# Altium PCB PCB1.PcbDoc
Units mil, origin at the board's own origin, x right, y up, seen from the top; angles counter-clockwise.
Board outline 2820.03 x 3975.03 mil, 2 copper layers (Top Layer, Bottom Layer); 35 components, 29 nets, 132 pads, 14 vias.
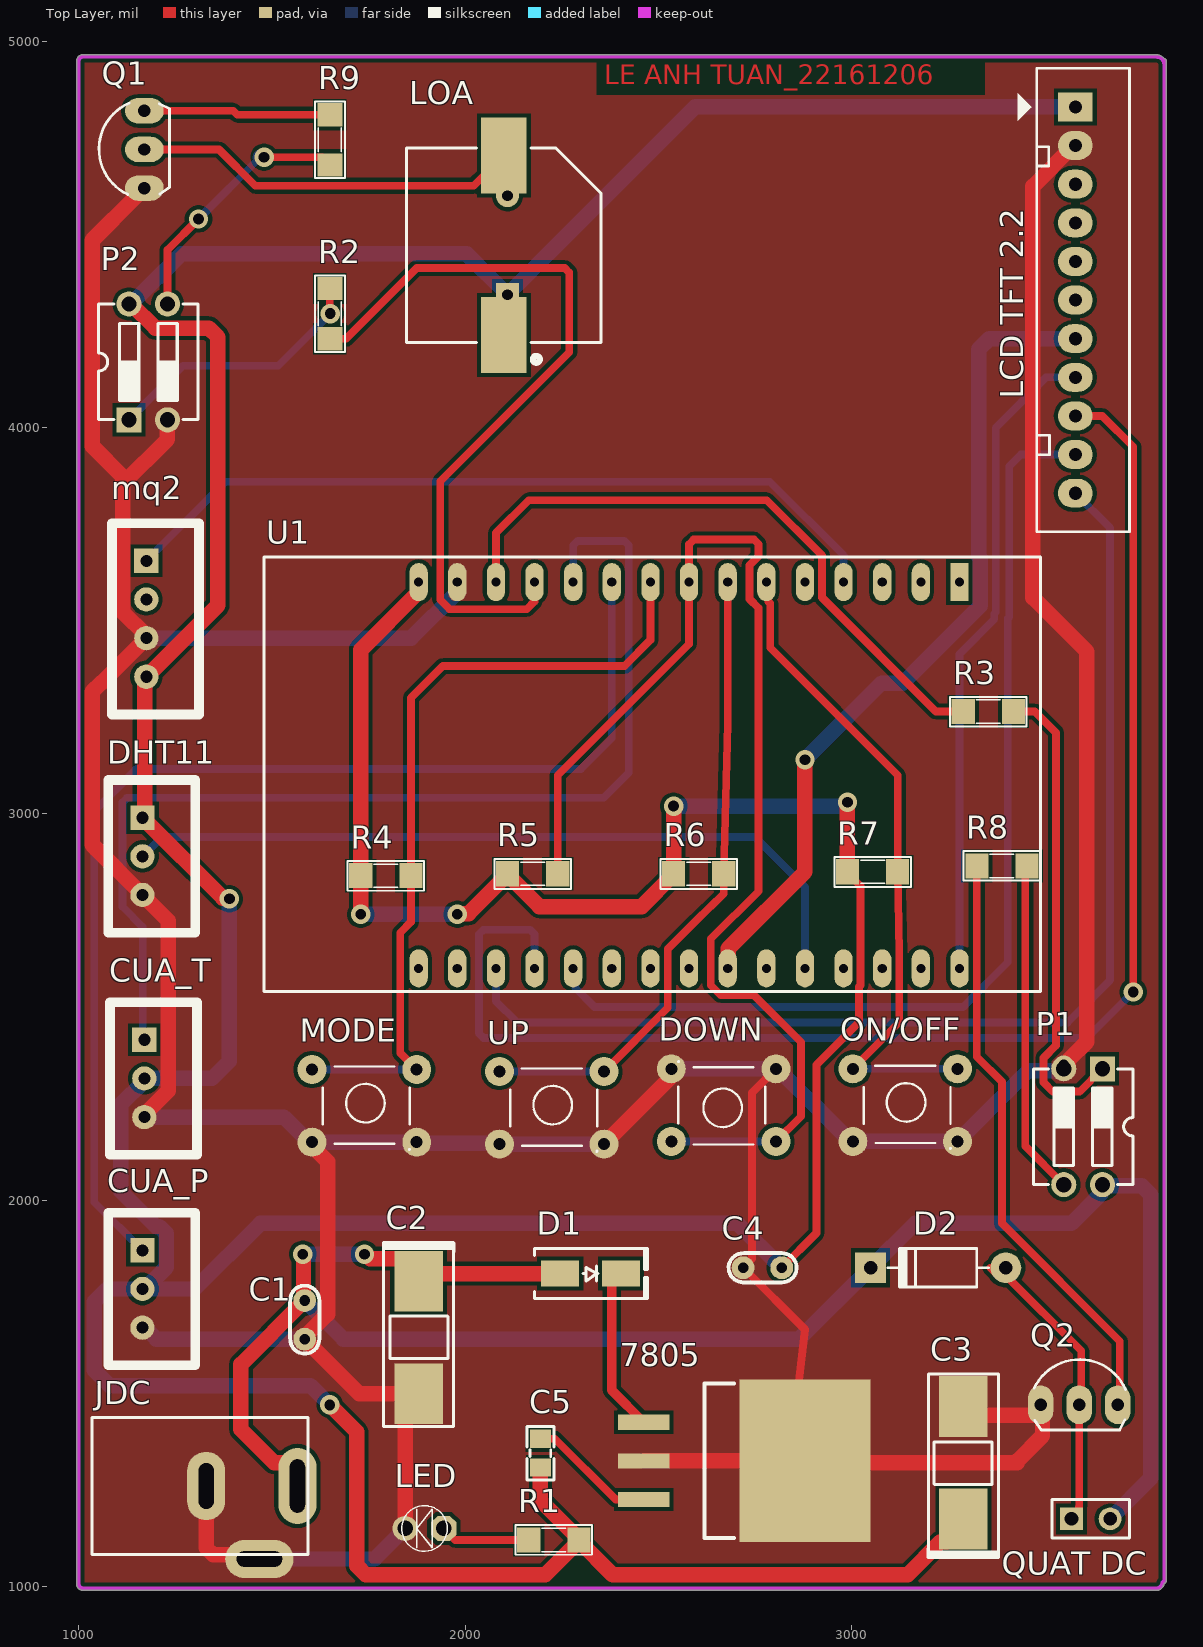
[diagram p0: Top Layer view]
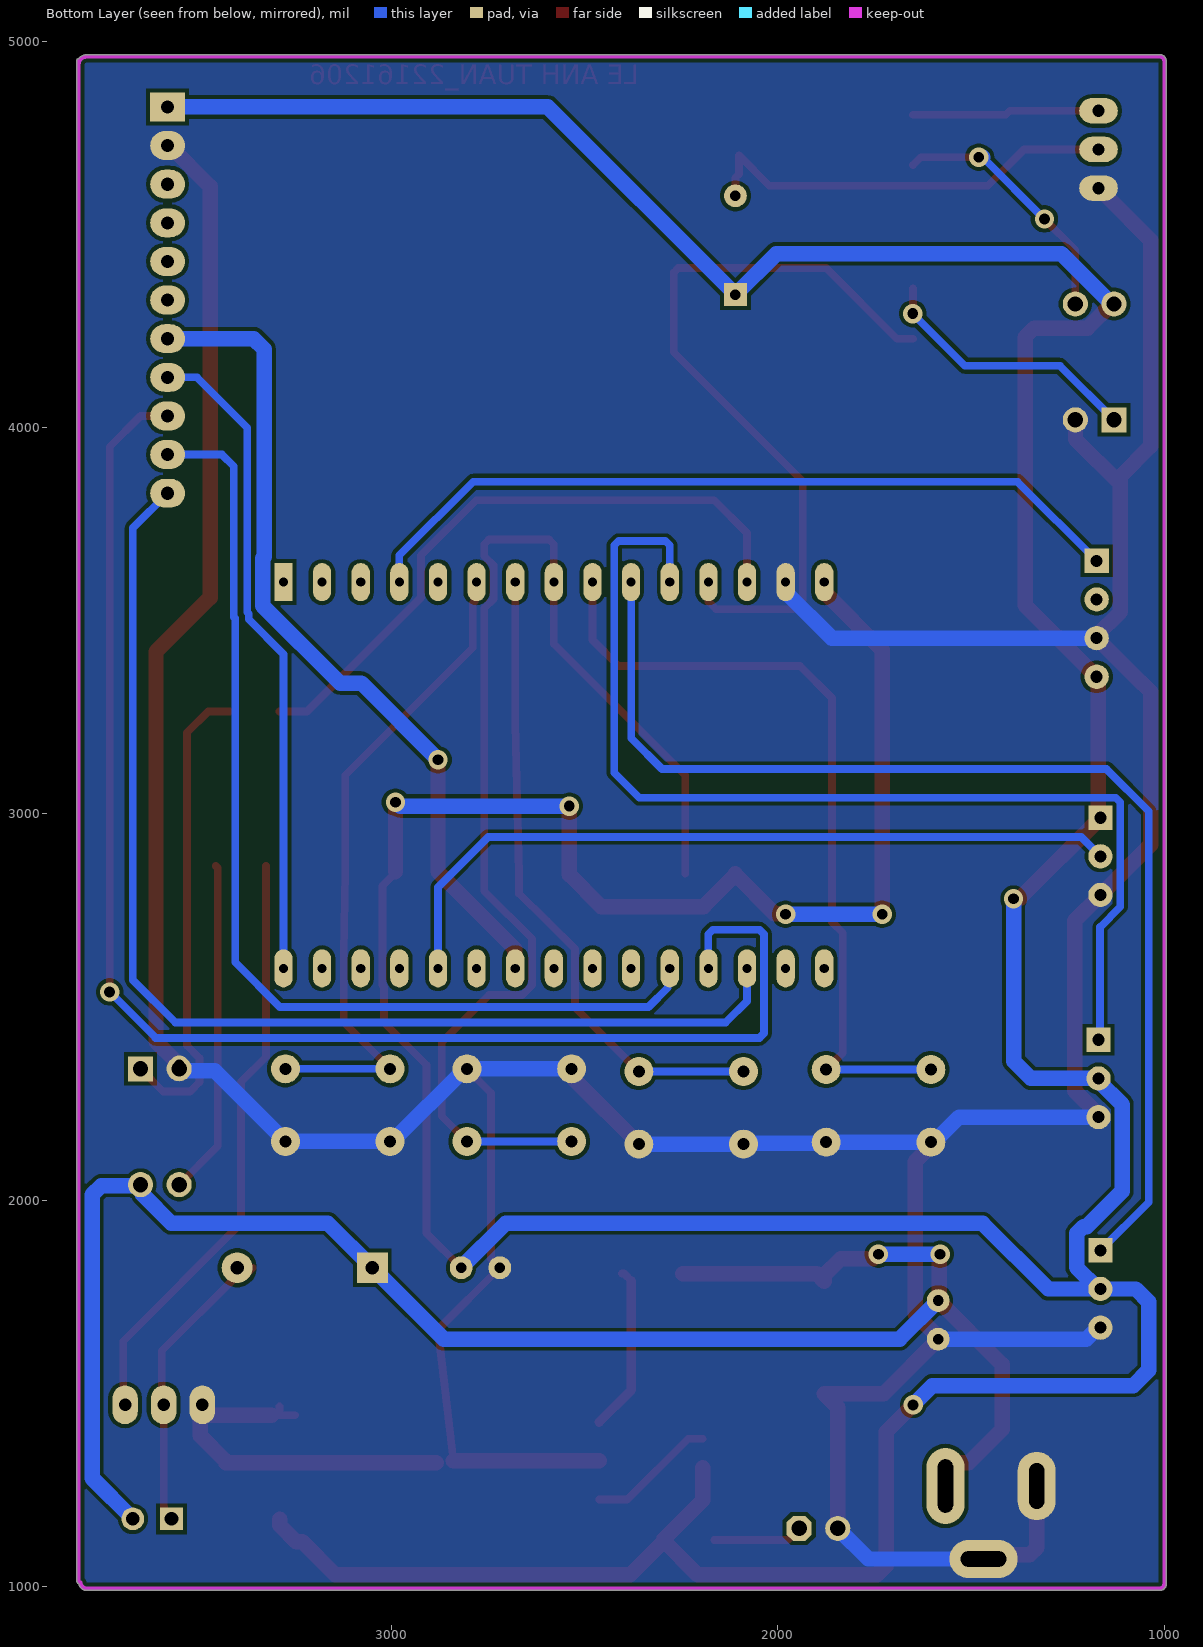
[diagram p1: Bottom Layer view, seen from below]

## Layer stack, top to bottom
Top Solder: solder mask 0.4, Solder Resist, Dk 3.5
Top Layer: signal copper 1.4
Dielectric 1: dielectric 12.6, FR-4, Dk 4.8
Bottom Layer: signal copper 1.4
Bottom Solder: solder mask 0.4, Solder Resist, Dk 3.5

## Board outline
994.99,1005 ccw(c1010,1005) 1010,989.99 3790,989.99 ccw(c3790,1010) 3809.64,1006.12 ccw(c3805,1015) 3815.01,1015 3815.01,4939.96 3815.01,4950 ccw(c3810,4950) 3810.01,4955.02 ccw(c3790,4940) 3790,4965.02 1010,4965.02 ccw(c1010,4950) 994.99,4950

## Design rules (kind name [scope] priority, off if disabled: settings)
Clearance [All] p1: gap=10 ignorepadtopadclearanceinfootprint=FALSE except(0: Arc-Hole Track-Hole SMDPad-Hole THPad-Hole Via-Hole Fill-Hole Poly-Hole Region-Hole Text-Hole)
PolygonConnect [All] p1: connectstyle=Direct reliefconductorwidth=10 reliefentries=4 polygonreliefangle="90 Angle" airgapwidth=10
RoutingVias [All] p1: holewidth=28 width=50 viastyle="Through Hole" minholewidth=28 minwidth=50 maxholewidth=28 maxwidth=50
SolderMaskExpansion [All] p1: expansion=4 istentingtop=FALSE
Width [All] p1: maxlimit=40 minlimit=15 preferedwidth=20
30 further rules are at their usual default settings.

## Components (designator, comment, footprint, x,y, rotation, side; value= is the part's Value field where it differs from the comment)
7805 "L7805ABD2T-TR" D2PAK4_94.4_433_43X133_SMD 2974.49,1325 r270 top
C1 "104" "tu gom" 1585,1690 r270 top
C2 "470uF" "tu tantalum smd7343" 1880,1644.33 r270 top
C3 "470uF" "tu tantalum smd7343" 3290,1320 r90 top
C4 "104" "tu gom" 2770,1825 r180 top
C5 "10uF" "Cap 0805" 2195,1345 r90 top
CUA_P "Header 3P 2.54 Duc Thang" XH2.54M-3 1165,1870 r270 top
CUA_T "Header 3P 2.54 Duc Thang" XH2.54M-3 1170,2415 r270 top
D1 "SS14" "DIODE SMA" 2325,1810 r0 top
D2 "1N4007" D1A 3400,1825 r0 top
DHT11 "Header 3P 2.54 Duc Thang" XH2.54M-3 1165,2990 r270 top
DOWN "" "Nut Nhan 4 Chan Cam 6x6" 2792,2144 r180 top
JDC "Jac DC" DC-IN 1034.72,1082.83 r0 top
"LCD TFT 2.2" "JP11" Header11 3580,4830 r270 top value="Connector 11"
LED "LED 3mm" LED-3MM-RED 1945,1150 r180 top
LOA "Buzzer" ABSM-1574 2100.55,4239.76 r90 top
MODE "" "Nut Nhan 4 Chan Cam 6x6" 1617,2346 r0 top
mq2 "Header 4P 2.54 Duc Thang" XH2.54M-4 1175,3655 r270 top
ON/OFF "" "Nut Nhan 4 Chan Cam 6x6" 3017,2348 r0 top
P1 "PC817" DIP-4 3600,2190 r270 top
P2 "PC817" DIP-4 1180,4170 r90 top
Q1 "C1815" TO92 1170,4720 r90 top value=C9014
Q2 "C1815" TO92 3590,1470 r0 top value=C9014
"QUAT DC" "Header 2" HDR1X2 3570,1175 r0 top
R1 "300" SM-1206 2230,1120 r0 top value="R1/4W - 1K"
R2 "300" SM-1206 1650,4295 r270 top value="R1/4W - 1K"
R3 "300" SM-1206 3355,3265 r180 top value="R1/4W - 1K"
R4 "10k" SM-1206 1795,2840 r180 top value="R1/4W - 1K"
R5 "10k" SM-1206 2175,2845 r180 top value="R1/4W - 1K"
R6 "10k" SM-1206 2605,2845 r180 top value="R1/4W - 1K"
R7 "10k" SM-1206 3055,2850 r180 top value="R1/4W - 1K"
R8 "2.2k" SM-1206 3390,2865 r0 top value="R1/4W - 1K"
R9 "2.2k" SM-1206 1650,4745 r270 top value="R1/4W - 1K"
U1 "ESP32" "ESP32 WROOM 32 KIT" 3280,3600 r270 top
UP "" "Nut Nhan 4 Chan Cam 6x6" 2102,2341 r0 top

## Footprints (in the part's own frame and the unit in brackets; to place one, negate y for a bottom-side part, rotate by r counter-clockwise, add the part's x,y. Pads: shape width x height; smd on the part's side, far side on the other; paste and mask are expansions set on the pad)
ABSM-1574 [mm] "Magnetic Transducer Buzzer"
  rect 5x3 smd: 1(0,0) 2(11.8,0)
  rect 1.5x1.5 hole 0.7: 1A(2.65,-0.24)
  round 1.5 hole 0.7: 2A(9.15,-0.24)
  silkscreen extent -1.83,-6.4 12.3,6.4
"Cap 0805" [mm] "Compoment SMD 80x50mil"
  rect 1.2x1.4 smd: 1(-0.946,-0.003) 2(0.954,-0.003)
  silkscreen extent -1.75,-0.89 1.75,0.89, body extent -0.97,-0.61 1.03,0.64, height 1.23
D1A [mil] "Diode 1A, W 100mil, L 350mil"
  round 80 hole 35: 1(0,0)
  rect 80x80 hole 35: 2(-350,0)
  silkscreen extent -305,-50 -45,50, body extent -386,-33 34,36, height 84
D2PAK4_94.4_433_43X133_SMD [mm]
  rect 1x3.4 smd: 1(-2.54,-13) 2(0,-13) 3(2.54,-13)
  rect 10.7x8.6 smd: 2(0,-2.4)
  round 1.27 on Top Overlay: ""(-4.075,-14.2)
  silkscreen extent -5.08,-9 5.08,-7.07, body extent -5.19,-13.89 5.21,1.96, height 4.6
DC-IN [mm] "Jac DC input"
  oval 2.5x5 hole 1 slot 3.5 at 90 deg: 1(13.5,4.5)
  oval 2.5x4.5 hole 1 slot 3 at 90 deg: 2(7.5,4.5)
  oval 4.5x2.5 hole 1 slot 3 at 0 deg: 3(11,-0.3)
  silkscreen extent 0,0 14.2,9, body extent 0,-0.5 13.83,9, height 11.02
"DIODE SMA" [mm] "SMA"
  rect 2.5x1.7 smd: 1(-2,0) 2(2,0)
  silkscreen extent -3.68,-1.65 3.75,1.65, body extent -2.6,-1.37 2.6,1.37, height 2.4
DIP-4 [mm] "DIP, 4-Pin, Row Spacing 7.62 mm, Pitch 2.54 mm"
  rect 1.65x1.65 hole 1: 1(-3.81,1.27)
  round 1.65 hole 1: 2(-3.81,-1.27) 3(3.81,-1.27) 4(3.81,1.27)
  silkscreen extent -3.8,-3.27 3.81,3.27, body extent -5.25,-3.02 5.25,3, height 3.1
"ESP32 WROOM 32 KIT" [mm]
  rect 2.5x1.2 hole 0.6: 1(0,0)
  oval 2.5x1.2 hole 0.6: 2(0,-2.54) 3(0,-5.08) 4(0,-7.62) 5(0,-10.16) 6(0,-12.7) 7(0,-15.24) 8(0,-17.78) 9(0,-20.32) 10(0,-22.86) 11(0,-25.4) 12(0,-27.94) 13(0,-30.48) 14(0,-33.02) 15(0,-35.56) 16(25.4,-35.56) 17(25.4,-33.02) 18(25.4,-30.48) 19(25.4,-27.94) 20(25.4,-25.4) 21(25.4,-22.86) 22(25.4,-20.32) 23(25.4,-17.78) 24(25.4,-15.24) 25(25.4,-12.7) 26(25.4,-10.16) 27(25.4,-7.62) 28(25.4,-5.08) 29(25.4,-2.54) 30(25.4,0)
  silkscreen extent -1.65,-45.72 26.92,5.33, body extent -1.65,-45.6 26.85,5.33, height 10.49
HDR1X2 [mm] "Connector; Header; 2 Position"
  rect 1.5x1.5 hole 0.9: 1(0,0)
  round 1.5 hole 0.9: 2(2.54,0)
  silkscreen extent -1.27,-1.27 3.81,1.27, body extent -1.27,-1.27 3.81,1.27, height 7
Header11 [mil] "CON11"
  rect 75x90 hole 34: 1(0,0)
  oval 75x90 hole 34: 2(100,0) 3(200,0) 4(300,0) 5(400,0) 6(500,0) 7(600,0) 8(700,0) 9(800,0) 10(900,0) 11(1000,0)
  silkscreen extent -100,-150 1100,140
LED-3MM-RED [mil]
  oct 65x65 hole 40: 1(0,0)
  round 65 hole 40: 2(100,0)
  silkscreen extent -9,-59 109,59, body extent -27,-77 117,80, height 181
"Nut Nhan 4 Chan Cam 6x6" [mil] "SW button 4pin, 250 x250 mil"
  round 75 hole 31: 1(-13,-8) 1(258,-8) 2(-13,-196) 2(258,-196)
  silkscreen extent 15,-215 240,0, body extent -31,-225 281,19, height 276
SM-1206 [mil] "Compoment SMD 120x60mil"
  rect 60x65 smd: 1(-65,0) 2(65,0)
  silkscreen extent -99,-38 99,39, body extent -83,-35 83,36, height 25
TO92 [mil] "TO-92"
  oval 66x100 hole 32: 1(-100,0) 2(0,0) 3(100,0)
  silkscreen extent -117,-65 120,118, body extent -109,-66 109,95, height 245
"tu gom" [mm] "Tu gom mini"
  round 1.5 hole 0.7: 1(-1.27,0) 2(1.27,0)
  silkscreen extent -2.25,-0.97 2.22,0.97, body extent -2.92,-0.85 2.92,0.85, height 6.12
"tu tantalum smd7343" [mm]
  rect 4x3.2 smd: 1(-3.7,0) 2(3.7,0)
  silkscreen extent -6.23,-2.31 5.85,2.31, body extent -3.75,-2.33 3.85,2.27, height 3.99
XH2.54M-3 [mm]
  rect 1.6x1.6 hole 0.8: 1(0,0)
  round 1.6 hole 0.8: 2(2.54,0) 3(5.08,0)
  silkscreen extent -2.48,-2.26 7.56,3.46, body extent -2.48,-2.26 7.56,3.48, height 6.91
XH2.54M-4 [mm]
  rect 1.6x1.6 hole 0.8: 1(0,0)
  round 1.6 hole 0.8: 2(2.54,0) 3(5.08,0) 4(7.62,0)
  silkscreen extent -2.48,-2.26 10.1,3.46, body extent -2.48,-2.26 10.1,3.48, height 6.91

## Part data
7805: library part REG_35V-5V-1.5A-7.5W-D2PAK, "Linear Voltage Regulator IC 1 Output 1.5A D2PAK", Alternate Part Number-1=NA, Case/Package=D2PAK, Manufacturer="Texas Instruments", Manufacturer Part Number=L7805ABD2T-TR, Supplier Part Number-1=L7805ABD2T-TR, Supplier-1="SP ROAD"
C1 C4: library part "Tu gom 104 50V", "Cắm", Chung_Loai=Cắm, Don_Vi=Con, Ma_Hang=MH004761, So_Chan=2, Ten_Linh_Kien="Tụ gốm 104 100nF 50V"
C2 C3: library part "Tu tantalum 470uF 10V SMD7343", "Dán", Chung_Loai=Dán, Don_Vi=Con, Ma_Hang=MH001956, So_Chan=2, Ten_Linh_Kien="Tụ tantalum 477A-470uF 10V SMD7343"
C5: library part "Cap 0805", "Capacitor SMD 0805"
CUA_P CUA_T DHT11 mq2: "Cắm", Chung_Loai=Cắm, Don_Vi=Con
  CUA_P CUA_T DHT11: Ma_Hang=MH001292, Ten_Linh_Kien="Header 3P XH2.54-3P Đực Thẳng"
  mq2: Ma_Hang=MH001285, Ten_Linh_Kien="Header 4P XH2.54-4P Đực Thẳng"
D1: library part "Diode SS14 ( 1N5819)", "Dán", Chung_Loai=Dán, Don_Vi=Con, Ma_Hang=MH002211, Ten_Linh_Kien="Diode SS14 DO214 Schottky 1A 40V ( 1N5819 DO214)"
D2: library part D1A, "Diode 1A"
DOWN MODE ON/OFF UP: library part "Nut Nhan 4 Chan Cam 6x6", "Nut Nhan 4 Chan 6x6mm", Ma_Hang=MH004584, Ten="Nút Nhấn 4 Chân 6x6x5MM DIP"
JDC: library part DCIN, "Jac DC input"
"LCD TFT 2.2": library part Header11, "Connector 11"
LED: library part "LED 3mm Do", "Cắm", Chung_Loai=Cắm, Don_Vi=Con, Ma_Hang=MH003892, Ten_Linh_Kien="Led 3MM Phủ Đỏ (10c)"
LOA: "Magnetic Transducer Buzzer", ComponentLink1Description="Manufacturer Link", ComponentLink1URL=http://www.megastar.com/linecard/buzzmode/index.php, DatasheetVersion=17-Dec-2003, LatestRevisionDate=17-Dec-2003, LatestRevisionNote="Schematic revised, PCB Footprint replaced.", PackageDescription="Magnetic Transducer Buzzer", PackageReference=ABSM-1574, Published=24-Mar-1999, Publisher="Altium Limited"
P1 P2: "NPN PHOTO General Purpose Amplifier", Code_JEDEC=TO-92A, DatasheetDocument=1997, LatestRevisionDate=15-Jan-2003, LatestRevisionNote="PCB Footprint 'BCY-W3/D4.7' replaced", PackageReference=TO-92A, Published=8-Jun-2000, Publisher="Altium Limited"
Q1 Q2: library part "Trans C1815 DIP", "NPN transistor"
"QUAT DC": "Header, 2-Pin", LatestRevisionDate=17-Jul-2002, LatestRevisionNote="Re-released for DXP Platform.", Publisher="Altium Limited"
R1 R2 R3 R4 R5 R6 R7 R8 R9: library part R, "Resistor 1/4W"
U1: library part "ESP32 WROOM 32 KIT"

## Via types
v1: diameter 50, hole 28, Top Layer to Bottom Layer, 14 vias

## Nets (pads, with @x,y where several pads share a name; then routed paths per layer and width w, separated by ;. In a path a pad name is that pad's centre, name@x,y a point inside that pad or via, vN(x,y) a via of type N, cw(c..) or ccw(c..) an arc to the next point about the centre after c; other vN are vias at no path point)
+5: "LCD TFT 2.2.1" C3.1 C4.1 C5.1 CUA_P.2 CUA_T.2 DHT11.1 LOA.1 LOA.1A mq2.4 P2.4 R1.2 R4.2 R5.2 R6.2 R7.2 U1.15 | length 14872.1
  Top Layer w20: C4.1 2910,1915 2910,2350 3020,2460 3020,2552.72 3023.62,2556.34 3023.62,2813.88 2990,2847.5 R7.2
  Top Layer w40: P2.4 1135.83,4320 1198.31,4257.52 1336.57,4257.52 1360,4234.09 1360,3540 mq2.4 1170.6,3350.6 1170.6,2995.6 DHT11.1 1373.09,2781.91 1388.09,2781.91 v1(1390,2780) ; v1(1650,1470) 1720,1400 1720,1053.43 1743.43,1030 2207.5,1030 R1.2@2295,1117.5 ; v1(1730,2740) R4.2 1730,3424.41 1880,3574.41 U1.15 ; v1(1980,2740) 1981.91,2741.91 2009.41,2741.91 R5.2@2110,2842.5 ; R5.2 R5.2@2110,2842.5 ; C5.1 2195.13,1222.37 2295,1122.5 R1.2 R1.2@2295,1117.5 ; v1(2540,3020) R6.2 2540,2842.5 2457.5,2760 2192.5,2760 R5.2@2110,2842.5 ; R7.2 v1(2990,3030) ; C3.1 3290,1158.58 3247.01,1115.59 3231.26,1115.59 3145.67,1030 2382.5,1030 R1.2@2295,1117.5
  Bottom Layer w40: P2.4 1135.83,4320 1265.83,4450 2004.09,4450 LOA.1A 2595.91,4830 3580,4830 ; v1(1390,2780) 1390,2360 1345,2315 CUA_T.2 1170,2308.78 1108.5,2247.28 1108.5,2023.43 1200.44,1931.5 1208.92,1931.5 1226.5,1913.92 1226.5,1826.08 CUA_P.2@1170.42,1770 ; v1(1650,1470) 1600,1520 1080,1520 1040,1560 1040,1736.57 1073.43,1770 CUA_P.2@1170.42,1770 ; v1(1730,2740) v1(1980,2740) ; v1(2540,3020) 2977.29,3020 2987.29,3030 v1(2990,3030) ; C4.1 2705,1940 1470,1940 1300,1770 CUA_P.2@1170.42,1770
+12: "QUAT DC.2" C1.1 C2.1 D1.1 D2.2 JDC.1 P1.4 | length 4765.7
  Top Layer w40: JDC.1 1566.22,1293.4 1539.23,1320.39 1505.83,1320.39 1419.68,1406.54 1419.68,1574.68 C1.1 1581.91,1743.09 1581.91,1858.09 v1(1580,1860) ; v1(1740,1860) 1742.71,1860 1753.97,1848.74 1837.01,1848.74 1880,1805.75 C2.1 1900,1810 D1.1
  Bottom Layer w40: v1(1580,1860) v1(1740,1860) ; C1.1 1685,1640 2865,1640 D2.2 3165,1940 3570,1940 3645.22,2015.22 3645.22,2035.22 P1.4 3652.48,2037.52 3751.57,2037.52 3775,2014.09 3775,1280 3670,1175
CLK: "LCD TFT 2.2.7" U1.24 | length 2168.8
  Top Layer w40: U1.24 2681.39,2601.39 2681.39,2651.39 2880,2850 v1(2880,3140)
  Bottom Layer w40: v1(2880,3140) 3078.33,3338.33 3133.59,3338.33 3333.62,3538.36 3333.62,3661.64 3330,3665.26 3330,4202.95 3357.05,4230 3580,4230
CS: "LCD TFT 2.2.11" U1.18 | length 3040.6
  Bottom Layer w20: U1.18 2080,2515 2135,2460 3560,2460 3670,2570 3670,3740 3580,3830
CUA_P: CUA_P.1 U1.10 | length 3010.8
  Bottom Layer w20: CUA_P.1 1040,1995 1040,3006.5 1149.5,3116 2300,3116 2380,3196 U1.10
CUA_T: CUA_T.1 U1.11 | length 2816.7
  Bottom Layer w20: CUA_T.1 1166,2419 1166,2706.89 1113.5,2759.39 1113.5,3029.78 1125.22,3041.5 2358.7,3041.5 2423.62,3106.41 2423.62,3694.85 2411.91,3706.56 2291.72,3706.56 2280,3694.85 U1.11
DHT11: DHT11.2 U1.26 | length 1999.6
  Bottom Layer w20: DHT11.2 1215,2940 2750,2940 2880,2810 U1.26
DOWN: DOWN.1 R5.1 U1.8 | length 3246.1
  Top Layer w20: R5.1 2240,3100 2580,3440 U1.8 2580,3698.28 2591.72,3710 2748.28,3710 2760,3698.28 2760,3667.28 2736.38,3643.66 2736.38,3556.34 2760,3532.72 2760,2800 2636.38,2676.38 2636.38,2556.34 2661.93,2530.79 2748.16,2530.79 2870,2408.94 2870,2217 DOWN.1@2805,2152
  Bottom Layer w20: DOWN.1@2534,2152 DOWN.1@2805,2152
GND: 7805.2 "LCD TFT 2.2.2" C1.2 C2.2 C3.2 C4.2 CUA_P.3 CUA_T.3 DHT11.3 DOWN.2 JDC.2 JDC.3 LED.2 MODE.2 mq2.3 ON/OFF.2 P1.2 P2.2 Q1.1 Q2.1 U1.14 UP.2 | length 13849.8
  Top Layer w20: DOWN.2@2805,2340 2743,2278 2743,1848 C4.2 2880,1665 2840.55,1329.64 7805.2@2840,1325 ; 7805.2@2880,1325 7805.2@2885,1320 ; C3.2@3250,1443.35 3290,1443.35 C3.2 ; Q2.1@3480,1443.35 Q2.1@3490,1443.35 ; Q2.1 Q2.1@3490,1443.35 ; Q2.1@3495,1443.35 Q2.1@3490,1443.35
  Top Layer w40: 1113.5,3853.5 1229.61,3969.61 1229.61,4019.61 P2.2 ; CUA_T.3 1170,2221.22 1231.5,2282.72 1231.5,2723.5 DHT11.3 1035,2920 1035,3316.33 1058.43,3339.76 1059.76,3339.76 mq2.3 1175,3461.22 1113.5,3522.72 1113.5,3873.5 1035,3952.01 1035,4485 1148.03,4598.03 1148.03,4607.99 1160.04,4620 Q1.1 ; JDC.2 1330,1100 1347.8,1082.2 1456.62,1082.2 JDC.3 ; MODE.2@1604,2150 1604,2140.53 1644.53,2100 1644.53,1704.68 1585,1645.16 C1.2 1726.34,1498.66 C2.2 1845,1463.66 LED.2 ; UP.2@2360,2145 2527.3,2312.3 2527.3,2333.3 DOWN.2@2534,2340 ; 7805.2@2462.68,1325 7805.2@2840,1325 ; 7805.2@2885,1320 3430,1320 ; C3.2@3310,1443.35 Q2.1@3480,1443.35 ; 3430,1325 3495,1390 Q2.1@3495,1443.35 ; v1(3550,2350) 3553.25,2350 3562.48,2359.23 3562.48,2362.48 3610,2410 3610,3419.86 3470,3559.86 3470,4624.61 3575.39,4730 3580,4730
  Bottom Layer w40: CUA_P.3 1171.22,1670 1201.22,1640 C1.2 ; CUA_T.3 1531.11,2215 1596.11,2150 1604,2150 1875,2150 1877.5,2147.5 2086.5,2147.5 2089,2145 UP.2@2360,2145 ; mq2.3 1860.59,3455 1980,3574.41 U1.14 ; JDC.3 1766.02,1071.02 LED.2 ; DOWN.2@2534,2340 2805,2340 2810.5,2340 2998.5,2152 3004,2152 3275,2152 3458.22,2335.22 3538.47,2335.22 3550,2346.75 v1(3550,2350)
LOA: R2.2 U1.12 | length 1998.5
  Top Layer w20: R2.2 1692,4230 1875,4413 2258.28,4413 2270,4401.28 2270,4195 1936,3861 1936,3554 1960,3530 2160,3530 2180,3550 U1.12
MODE: MODE.1 R4.1 U1.9 | length 2094.5
  Top Layer w20: MODE.1@1875,2338 1832,2381 1832,2692 1860,2720 R4.1 1860,3300 1943,3383 2413,3383 2480,3450 U1.9
  Bottom Layer w20: MODE.1@1604,2338 MODE.1@1875,2338
MQ2: mq2.1 U1.4 | length 2038
  Bottom Layer w20: mq2.1 1380,3860 2789,3860 2980,3669 U1.4
Net7805_1: 7805.1 D1.2 | length 432.2
  Top Layer w20: D1.2@2380,1791.54 2398.46,1810 D1.2
  Top Layer w25: D1.2@2380,1791.54 2380,1507.68 7805.1
Net7805_3: 7805.3 C5.2 | length 332.8
  Top Layer w20: C5.2 2232.43,1382.57 2390,1225 7805.3
NetD2_1: "QUAT DC.1" D2.1 Q2.2 | length 751.5
  Top Layer w20: D2.1@3360,1825 D2.1@3380,1805 ; D2.1@3400,1805 3595,1610 Q2.2@3595,1470 ; 3570,1175 3589.53,1194.53 3589.53,1205.77 3590,1206.24 3590,1460 Q2.2@3580,1470
NetLED_1: LED.1 R1.1 | length 232.4
  Top Layer w20: LED.1 1975,1120 R1.1
NetLOA_2: LOA.2 LOA.2A Q1.2 | length 1110.2
  Top Layer w20: Q1.2 1363,4720 1457,4626 2022.22,4626 LOA.2 2100.55,4656.45 2110,4647 LOA.2A
NetP1_1: P1.1 R3.1 | length 1237.8
  Top Layer w20: R3.1 3475,3265 3530,3210 3530,2400.5 3497.52,2368.02 3497.52,2305.48 3522,2281 3591,2281 P1.1
NetP1_3: P1.3 R8.2 | length 868.5
  Top Layer w20: R8.2 3450,2860 3450,2140 P1.3
NetP2_1: P2.1 R2.1 | length 700.3
  Top Layer w20: R2.1 1650,4296 v1(1651,4295)
  Bottom Layer w20: P2.1 1270,4160 1516,4160 v1(1651,4295)
NetP2_3: P2.3 R9.2 | length 683.4
  Top Layer w20: P2.3@1230,4314.57 1230,4460 v1(1310,4540) ; v1@1475.47,4692.76 1482.71,4700 1630,4700 R9.2
  Top Layer w40: v1(1480,4700) v1@1482.71,4700
  Bottom Layer w20: v1(1310,4540) v1@1470,4700
  Bottom Layer w40: v1@1470,4700 v1(1480,4700)
NetQ1_3: Q1.3 R9.1 | length 484.1
  Top Layer w20: Q1.3 1400,4820 1410,4810 R9.1
NetQ2_3: Q2.3 R8.1 | length 1550.3
  Top Layer w20: R8.1 3325,2371.32 3390,2306.32 3390,1940 3695,1635 3695,1475 Q2.3
ON/OFF: ON/OFF.1 R7.1 U1.6 | length 1721.6
  Top Layer w20: U1.6 2785.21,3594.79 2785.21,3549.93 2790,3545.14 2790,3430 3120,3100 R7.1 3124,2639 3124,2460 ON/OFF.1@3004,2340
  Bottom Layer w20: ON/OFF.1@3004,2340 ON/OFF.1@3275,2340
QUAT: R3.2 U1.13 | length 1662.4
  Top Layer w20: U1.13 2080,3727 2164.72,3811.72 2781.28,3811.72 2924,3669 2924,3560 3219,3265 R3.2
RS: "LCD TFT 2.2.9" U1.19 | length 3840.8
  Top Layer w20: 3580,4030 3650,4030 3730,3950 v1(3730,2539)
  Bottom Layer w20: U1.19 2180,2688.28 2168.28,2700 2047.72,2700 2036,2688.28 2036,2431.72 2047.72,2420 3611,2420 v1(3730,2539)
RST: "LCD TFT 2.2.10" U1.20 | length 2709.9
  Bottom Layer w20: U1.20 2285.21,2594.79 2285.21,2549.93 2335.14,2500 3289.31,2500 3405.14,2615.83 3405.14,3505.74 3408.76,3509.37 3408.76,3899.62 3439.14,3930 3580,3930
SDA: "LCD TFT 2.2.8" U1.30 | length 1698.8
  Bottom Layer w20: U1.30 3280,3413.43 3370,3503.43 3370,3518.17 3373.62,3521.79 3373.62,3999.62 3504,4130 3580,4130
UP: R6.1 U1.7 UP.1 | length 1667.1
  Top Layer w20: UP.1@2360,2333 2525,2498 2525,2650 2598,2723 2670,2793 R6.1 2680,3233 U1.7
  Bottom Layer w20: UP.1@2089,2333 UP.1@2360,2333
pads on no net: 7805. "LCD TFT 2.2.3" "LCD TFT 2.2.4" "LCD TFT 2.2.5" "LCD TFT 2.2.6" mq2.2 U1.1 U1.2 U1.3 U1.5 U1.16 U1.17 U1.21 U1.22 U1.23 U1.25 U1.27 U1.28 U1.29

## Polygon pours and split planes (outlines as drawn)
GND on Top Layer "GND_L01_P001" (solid, remove dead copper, pour order 1): 1010,4950 3800,4950 3810,4940 3800,4930 3800,990 1000,990 1010,1000
GND on Bottom Layer "GND_L02_P000" (solid, remove dead copper, pour order 0): 1000,4960 3810,4960 3810,1010 3790,990 1010,990 1010,4530 1000,4540

## Keep-outs
Keep-Out Layer:
  lines w10: 2240,4960 2260,4960 ; 3810,4940 ccw(c3790,4940) 3790,4960 ; 3810,4950 3810,1015 cw(c3805,1015) 3805,1010 cw(c3790,1010) 3790,995 1010,995 cw(c1010,1005) 1000,1005 1000,4830 1000,4950 cw(c1010,4950) 1010,4960 1020,4960 3790,4960 ; 3790,4960 3790,4960

## Other copper
Top Layer:
  text "LE ANH TUAN_22161206" at 2360,4888.33 h50